# Altium PCB MSP_Adapter.PcbDoc
Units mil, origin at the board's own origin, x right, y up, seen from the top; angles counter-clockwise.
Board outline 2235 x 4400 mil, 2 copper layers (Top Layer, Bottom Layer); 25 components, 32 nets, 325 pads, 0 vias.
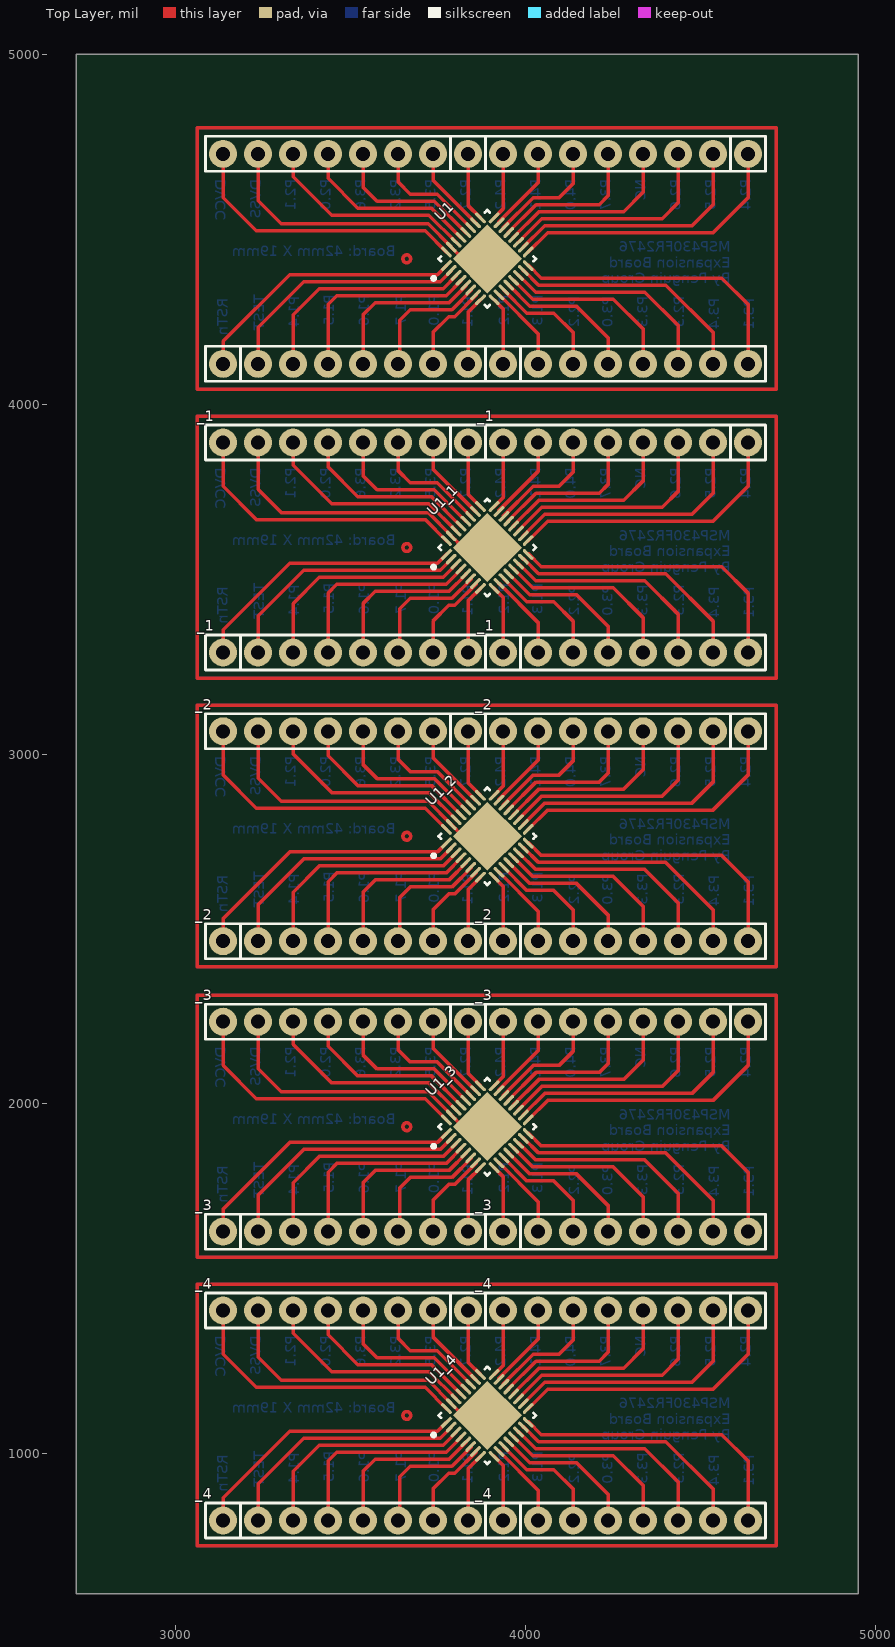
[diagram p0: Top Layer view]
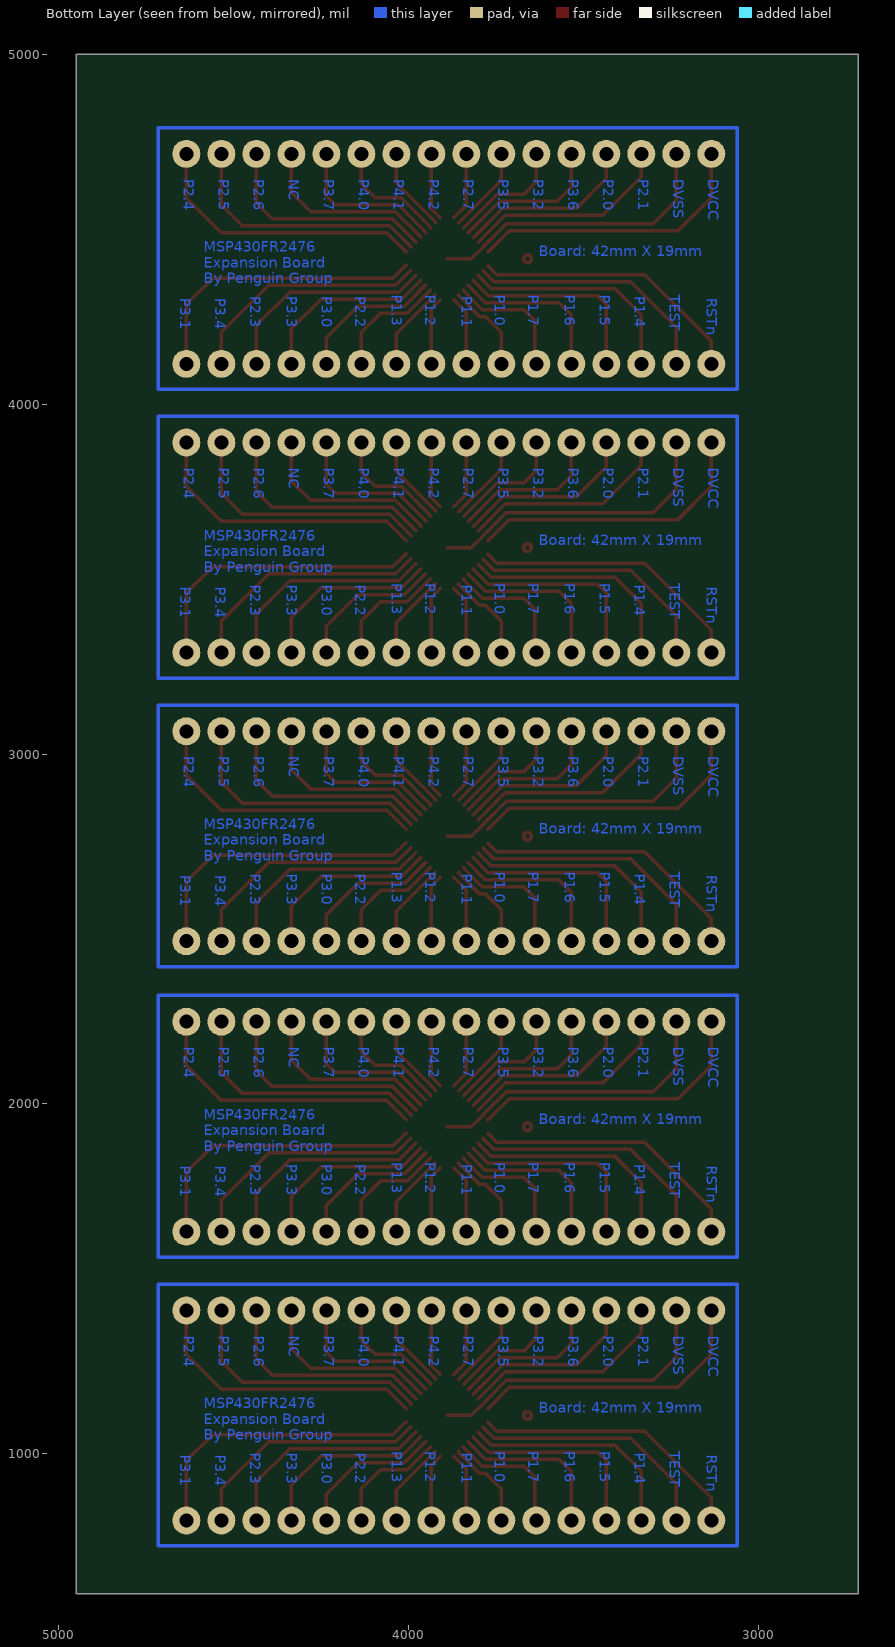
[diagram p1: Bottom Layer view, seen from below]

## Layer stack, top to bottom
Top Solder: solder mask 0.4, Solder Resist, Dk 3.5
Top Layer: signal copper 1.4
Dielectric 1: dielectric 12.6, FR-4, Dk 4.8
Bottom Layer: signal copper 1.4
Bottom Solder: solder mask 0.4, Solder Resist, Dk 3.5

## Board outline
2715,600 4950,600 4950,5000 2715,5000

## Design rules (kind name [scope] priority, off if disabled: settings)
Clearance [All] p1: gap=10 ignorepadtopadclearanceinfootprint=TRUE
PolygonConnect [All] p1: connectstyle=Relief reliefconductorwidth=10 reliefentries=4 polygonreliefangle="90 Angle" airgapwidth=10
RoutingVias [All] p1: holewidth=28 width=50 viastyle="Through Hole" minholewidth=28 minwidth=50 maxholewidth=28 maxwidth=50
SolderMaskExpansion [All] p1: expansion=4 istentingtop=FALSE
Width [All] p1: maxlimit=10 minlimit=10 preferedwidth=10
30 further rules are at their usual default settings.

## Classes and differential pairs
component class MSP_Adapter: U1

## Components (designator, comment, footprint, x,y, rotation, side; value= is the part's Value field where it differs from the comment)
_1 "CON8" SIP8 3135,3290 r0 top (schematic designator J1)
_1 "CON8" SIP8 3935,3290 r0 top (schematic designator J2)
_1 "CON8" SIP8 4635,3890 r180 top (schematic designator J3)
_1 "CON8" SIP8 3835,3890 r180 top (schematic designator J4)
_2 "CON8" SIP8 3135,2465 r0 top (schematic designator J1)
_2 "CON8" SIP8 3935,2465 r0 top (schematic designator J2)
_2 "CON8" SIP8 4635,3065 r180 top (schematic designator J3)
_2 "CON8" SIP8 3835,3065 r180 top (schematic designator J4)
_3 "CON8" SIP8 3135,1635 r0 top (schematic designator J1)
_3 "CON8" SIP8 3935,1635 r0 top (schematic designator J2)
_3 "CON8" SIP8 4635,2235 r180 top (schematic designator J3)
_3 "CON8" SIP8 3835,2235 r180 top (schematic designator J4)
_4 "CON8" SIP8 3135,810 r0 top (schematic designator J1)
_4 "CON8" SIP8 3935,810 r0 top (schematic designator J2)
_4 "CON8" SIP8 4635,1410 r180 top (schematic designator J3)
_4 "CON8" SIP8 3835,1410 r180 top (schematic designator J4)
J1 "CON8" SIP8 3135,4115 r0 top
J2 "CON8" SIP8 3935,4115 r0 top
J3 "CON8" SIP8 4635,4715 r180 top
J4 "CON8" SIP8 3835,4715 r180 top
U1 "MSP430FR2476TRHBR" FP-RHB0032E-IPC_A 3890,4415 r45 top
U1_1 "MSP430FR2476TRHBR" FP-RHB0032E-IPC_A 3890,3590 r45 top (schematic designator U1)
U1_2 "MSP430FR2476TRHBR" FP-RHB0032E-IPC_A 3890,2765 r45 top (schematic designator U1)
U1_3 "MSP430FR2476TRHBR" FP-RHB0032E-IPC_A 3890,1935 r45 top (schematic designator U1)
U1_4 "MSP430FR2476TRHBR" FP-RHB0032E-IPC_A 3890,1110 r45 top (schematic designator U1)

## Footprints (in the part's own frame and the unit in brackets; to place one, negate y for a bottom-side part, rotate by r counter-clockwise, add the part's x,y. Pads: shape width x height; smd on the part's side, far side on the other; paste and mask are expansions set on the pad)
FP-RHB0032E-IPC_A [mm]
  rect 1.01x0.242 smd paste+0 mask+0: 1(-2.451,1.75)
  rrect100% 1.01x0.242 smd paste+0 mask+0: 2(-2.451,1.25) 3(-2.451,0.75) 4(-2.451,0.25) 5(-2.451,-0.25) 6(-2.451,-0.75) 7(-2.451,-1.25) 8(-2.451,-1.75) 17(2.451,-1.75) 18(2.451,-1.25) 19(2.451,-0.75) 20(2.451,-0.25) 21(2.451,0.25) 22(2.451,0.75) 23(2.451,1.25) 24(2.451,1.75)
  rrect100% 0.242x1.01 smd paste+0 mask+0: 9(-1.75,-2.451) 10(-1.25,-2.451) 11(-0.75,-2.451) 12(-0.25,-2.451) 13(0.25,-2.451) 14(0.75,-2.451) 15(1.25,-2.451) 16(1.75,-2.451) 25(1.75,2.451) 26(1.25,2.451) 27(0.75,2.451) 28(0.25,2.451) 29(-0.25,2.451) 30(-0.75,2.451) 31(-1.25,2.451) 32(-1.75,2.451)
  rect 3.55x3.55 smd paste-1000 mask+0: 33(0,0)
  silkscreen extent -3.88,-2.5 2.5,2.5, body extent -3.46,-3.46 3.46,3.46, height 0.25
SIP8 [mil]
  round 80 hole 40: 1(0,0) 2(100,0) 3(200,0) 4(300,0) 5(400,0) 6(500,0) 7(600,0) 8(700,0)
  silkscreen extent -50,-50 750,50, body extent -50,-50 750,50, height 330

## Part data
U1 U1_1 U1_2 U1_3 U1_4: library part CMP-04869-000099-1, "IC MCU 16BIT 64.5KB FRAM 32VQFN"

## Nets (pads, with @x,y where several pads share a name; then routed paths per layer and width w, separated by ;. In a path a pad name is that pad's centre, name@x,y a point inside that pad or via, vN(x,y) a via of type N, cw(c..) or ccw(c..) an arc to the next point about the centre after c; other vN are vias at no path point)
DVCC: J4.8 U1.32 | length 827.4
  Top Layer w10: J4.8 3135,4590 3230,4495 3712.56,4495 U1.32
DVSS: J4.7 U1.31 U1.33 | length 858.3
  Top Layer w10: J4.7 3235,4580.86 3300.86,4515 3720.85,4515 3787.18,4448.66 U1.31 3820.4,4415 U1.33
NC: J3.4 U1.20 | length 534.5
  Top Layer w10: U1.20 3964.53,4476.95 4037.58,4550 4280,4550 4335,4605 J3.4
P1.0: J1.7 U1.7 | length 258.5
  Top Layer w10: J1.7 3735,4205 3780,4250 3797.27,4250 3857.89,4310.63 U1.7
P1.1: J1.8 U1.8 | length 197.7
  Top Layer w10: J1.8 3835,4262.56 U1.8
P1.2: J2.1 U1.9 | length 193.6
  Top Layer w10: U1.9 3935,4272.56 J2.1
P1.3: J2.2 U1.10 | length 243.6
  Top Layer w10: U1.10 3923.66,4312.18 4035,4200.85 J2.2
P1.4: J1.3 U1.3 | length 653.4
  Top Layer w10: J1.3 3335,4255 3410,4330 3764.13,4330 3801.33,4367.19 U1.3
P1.5: J1.4 U1.4 | length 579.6
  Top Layer w10: J1.4 3435,4285 3460,4310 3772.42,4310 3815.47,4353.05 U1.4
P1.6: J1.5 U1.5 | length 470.6
  Top Layer w10: J1.5 3535,4255 3570,4290 3780.7,4290 3829.61,4338.91 U1.5
P1.7: J1.6 U1.6 | length 367.5
  Top Layer w10: J1.6 3640,4120 3640,4240 3670,4270 3788.99,4270 3843.75,4324.77 U1.6
P2.0: J4.5 U1.29 | length 519.9
  Top Layer w10: J4.5 3435,4645 3520,4560 3730.64,4560 3814.58,4476.06 U1.29
P2.1: J4.6 U1.30 | length 608.6
  Top Layer w10: J4.6 3335,4650 3445,4540 3723.24,4540 U1.30
P2.2: J2.3 U1.11 | length 337.7
  Top Layer w10: U1.11 4003.24,4260 4080,4260 4135,4205 J2.3
P2.3: J2.6 U1.14 | length 625.5
  Top Layer w10: U1.14 3979.79,4368.31 4028.09,4320 4340,4320 4435,4225 J2.6
P2.4: J3.1 U1.17 | length 817.4
  Top Layer w10: U1.17 4062.44,4490 4535,4490 4635,4590 J3.1
P2.5: J3.2 U1.18 | length 737.8
  Top Layer w10: U1.18 3992.82,4448.66 4054.15,4510 4475,4510 4535,4570 J3.2
P2.6: J3.3 U1.19 | length 643.4
  Top Layer w10: U1.19 3978.67,4462.81 4045.87,4530 4390,4530 4435,4575 J3.3
P2.7: J4.1 U1.25 | length 197.7
  Top Layer w10: J4.1 3835,4567.44 U1.25
P3.0: J2.4 U1.12 | length 421
  Top Layer w10: U1.12 3951.5,4340.02 4011.53,4280 4145,4280 4235,4190 J2.4
P3.1: J2.8 U1.16 | length 844.7
  Top Layer w10: U1.16 4008.07,4396.59 4044.66,4360 4560,4360 4635,4285 J2.8
P3.2: J4.3 U1.27 | length 341.9
  Top Layer w10: J4.3 3635,4635 3670,4600 3746.76,4600 U1.27
P3.3: J2.5 U1.13 | length 527.6
  Top Layer w10: U1.13 3965.64,4354.17 4019.81,4300 4250,4300 4335,4215 J2.5
P3.4: J2.7 U1.15 | length 705.8
  Top Layer w10: U1.15 3993.93,4382.45 4036.38,4340 4400,4340 4535,4205 J2.7
P3.5: J4.2 U1.26 | length 247.8
  Top Layer w10: J4.2 3735,4639.15 3856.34,4517.82 U1.26
P3.6: J4.4 U1.28 | length 442.5
  Top Layer w10: J4.4 3535,4620 3575,4580 3738.92,4580 U1.28
P3.7: J3.5 U1.21 | length 448.9
  Top Layer w10: U1.21 3950.39,4491.09 4029.3,4570 4210,4570 4235,4595 J3.5
P4.0: J3.6 U1.22 | length 337
  Top Layer w10: U1.22 3936.25,4505.23 4021.01,4590 4095,4590 4135,4630 J3.6
P4.1: J3.7 U1.23 | length 244.3
  Top Layer w10: U1.23 3922.11,4519.37 4035,4632.27 J3.7
P4.2: J3.8 U1.24 | length 193.6
  Top Layer w10: U1.24 3935,4557.44 J3.8
RSTn: J1.1 U1.1 | length 792.3
  Top Layer w10: J1.1 3135,4180 3325,4370 3747.56,4370 U1.1
TEST: J1.2 U1.2 | length 724.3
  Top Layer w10: J1.2 3235,4220 3365,4350 3755.85,4350 3787.18,4381.34 U1.2
pads on no net: _1.1 _1.2 _1.3 _1.4 _1.5 _1.6 _1.7 _1.8 _2.1 _2.2 _2.3 _2.4 _2.5 _2.6 _2.7 _2.8 _3.1 _3.2 _3.3 _3.4 _3.5 _3.6 _3.7 _3.8 _4.1 _4.2 _4.3 _4.4 _4.5 _4.6 _4.7 _4.8 U1_1.1 U1_1.2 U1_1.3 U1_1.4 U1_1.5 U1_1.6 U1_1.7 U1_1.8 U1_1.9 U1_1.10 U1_1.11 U1_1.12 U1_1.13 U1_1.14 U1_1.15 U1_1.16 U1_1.17 U1_1.18 U1_1.19 U1_1.20 U1_1.21 U1_1.22 U1_1.23 U1_1.24 U1_1.25 U1_1.26 U1_1.27 U1_1.28 U1_1.29 U1_1.30 U1_1.31 U1_1.32 U1_1.33 U1_2.1 U1_2.2 U1_2.3 U1_2.4 U1_2.5 U1_2.6 U1_2.7 U1_2.8 U1_2.9 U1_2.10 U1_2.11 U1_2.12 U1_2.13 U1_2.14 U1_2.15 U1_2.16 U1_2.17 U1_2.18 U1_2.19 U1_2.20 U1_2.21 U1_2.22 U1_2.23 U1_2.24 U1_2.25 U1_2.26 U1_2.27 U1_2.28 U1_2.29 U1_2.30 U1_2.31 U1_2.32 U1_2.33 U1_3.1 U1_3.2 U1_3.3 U1_3.4 U1_3.5 U1_3.6 U1_3.7 U1_3.8 U1_3.9 U1_3.10 U1_3.11 U1_3.12 U1_3.13 U1_3.14 U1_3.15 U1_3.16 U1_3.17 U1_3.18 U1_3.19 U1_3.20 U1_3.21 U1_3.22 U1_3.23 U1_3.24 U1_3.25 U1_3.26 U1_3.27 U1_3.28 U1_3.29 U1_3.30 U1_3.31 U1_3.32 U1_3.33 U1_4.1 U1_4.2 U1_4.3 U1_4.4 U1_4.5 U1_4.6 U1_4.7 U1_4.8 U1_4.9 U1_4.10 U1_4.11 U1_4.12 U1_4.13 U1_4.14 U1_4.15 U1_4.16 U1_4.17 U1_4.18 U1_4.19 U1_4.20 U1_4.21 U1_4.22 U1_4.23 U1_4.24 U1_4.25 U1_4.26 U1_4.27 U1_4.28 U1_4.29 U1_4.30 U1_4.31 U1_4.32 U1_4.33
copper on no net: | length 112160.9
  Top Layer w10: 3135,810 3135,875 3325,1065 3747.56,1065 3773.04,1090.48 ; 3135,1410 3135,1285 3230,1190 3712.56,1190 3773.04,1129.52 ; 3135,1635 3135,1700 3325,1890 3747.56,1890 3773.04,1915.48 ; 3135,2235 3135,2110 3230,2015 3712.56,2015 3773.04,1954.52 ; 3135,2465 3135,2530 3325,2720 3747.56,2720 3773.04,2745.48 ; 3135,3065 3135,2940 3230,2845 3712.56,2845 3773.04,2784.52 ; 3135,3290 3135,3355 3325,3545 3747.56,3545 3773.04,3570.48 ; 3135,3890 3135,3765 3230,3670 3712.56,3670 3773.04,3609.52 ; 3235,810 3235,915 3365,1045 3755.85,1045 3787.18,1076.34 3786.96,1076.56 ; 3235,1410 3235,1275.86 3300.86,1210 3720.85,1210 3787.18,1143.66 3786.96,1143.44 3820.4,1110 3890,1110 ; 3235,1635 3235,1740 3365,1870 3755.85,1870 3787.18,1901.34 3786.96,1901.56 ; 3235,2235 3235,2100.86 3300.86,2035 3720.85,2035 3787.18,1968.66 3786.96,1968.44 3820.4,1935 3890,1935 ; 3235,2465 3235,2570 3365,2700 3755.85,2700 3787.18,2731.34 3786.96,2731.56 ; 3235,3065 3235,2930.86 3300.86,2865 3720.85,2865 3787.18,2798.66 3786.96,2798.44 3820.4,2765 3890,2765 ; 3235,3290 3235,3395 3365,3525 3755.85,3525 3787.18,3556.34 3786.96,3556.56 ; 3235,3890 3235,3755.86 3300.86,3690 3720.85,3690 3787.18,3623.66 3786.96,3623.44 3820.4,3590 3890,3590 ; 3335,810 3335,950 3410,1025 3764.13,1025 3801.33,1062.19 3800.88,1062.64 ; 3335,1410 3335,1345 3445,1235 3723.24,1235 3800.88,1157.36 ; 3335,1635 3335,1775 3410,1850 3764.13,1850 3801.33,1887.19 3800.88,1887.64 ; 3335,2235 3335,2170 3445,2060 3723.24,2060 3800.88,1982.36 ; 3335,2465 3335,2605 3410,2680 3764.13,2680 3801.33,2717.19 3800.88,2717.64 ; 3335,3065 3335,3000 3445,2890 3723.24,2890 3800.88,2812.36 ; 3335,3290 3335,3430 3410,3505 3764.13,3505 3801.33,3542.19 3800.88,3542.64 ; 3335,3890 3335,3825 3445,3715 3723.24,3715 3800.88,3637.36 ; 3435,810 3435,980 3460,1005 3772.42,1005 3815.47,1048.05 3814.8,1048.72 ; 3435,1410 3435,1340 3520,1255 3730.64,1255 3814.58,1171.06 3814.8,1171.28 ; 3435,1635 3435,1805 3460,1830 3772.42,1830 3815.47,1873.05 3814.8,1873.72 ; 3435,2235 3435,2165 3520,2080 3730.64,2080 3814.58,1996.06 3814.8,1996.28 ; 3435,2465 3435,2635 3460,2660 3772.42,2660 3815.47,2703.05 3814.8,2703.72 ; 3435,3065 3435,2995 3520,2910 3730.64,2910 3814.58,2826.06 3814.8,2826.28 ; 3435,3290 3435,3460 3460,3485 3772.42,3485 3815.47,3528.05 3814.8,3528.72 ; 3435,3890 3435,3820 3520,3735 3730.64,3735 3814.58,3651.06 3814.8,3651.28 ; 3535,810 3535,950 3570,985 3780.7,985 3829.61,1033.91 3828.72,1034.8 ; 3535,1410 3535,1315 3575,1275 3738.92,1275 3828.72,1185.2 ; 3535,1635 3535,1775 3570,1810 3780.7,1810 3829.61,1858.91 3828.72,1859.8 ; 3535,2235 3535,2140 3575,2100 3738.92,2100 3828.72,2010.2 ; 3535,2465 3535,2605 3570,2640 3780.7,2640 3829.61,2688.91 3828.72,2689.8 ; 3535,3065 3535,2970 3575,2930 3738.92,2930 3828.72,2840.2 ; 3535,3290 3535,3430 3570,3465 3780.7,3465 3829.61,3513.91 3828.72,3514.8 ; 3535,3890 3535,3795 3575,3755 3738.92,3755 3828.72,3665.2 ; 3635,810 3640,815 3640,935 3670,965 3788.99,965 3843.75,1019.77 3842.64,1020.88 ; 3635,1410 3635,1330 3670,1295 3746.76,1295 3842.64,1199.12 ; 3635,1635 3640,1640 3640,1760 3670,1790 3788.99,1790 3843.75,1844.77 3842.64,1845.88 ; 3635,2235 3635,2155 3670,2120 3746.76,2120 3842.64,2024.12 ; 3635,2465 3640,2470 3640,2590 3670,2620 3788.99,2620 3843.75,2674.77 3842.64,2675.88 ; 3635,3065 3635,2985 3670,2950 3746.76,2950 3842.64,2854.12 ; 3635,3290 3640,3295 3640,3415 3670,3445 3788.99,3445 3843.75,3499.77 3842.64,3500.88 ; 3635,3890 3635,3810 3670,3775 3746.76,3775 3842.64,3679.12 ; 3735,810 3735,900 3780,945 3797.27,945 3857.89,1005.63 3856.56,1006.96 ; 3735,1410 3735,1334.15 3856.34,1212.82 3856.56,1213.04 ; 3735,1635 3735,1725 3780,1770 3797.27,1770 3857.89,1830.63 3856.56,1831.96 ; 3735,2235 3735,2159.15 3856.34,2037.82 3856.56,2038.04 ; 3735,2465 3735,2555 3780,2600 3797.27,2600 3857.89,2660.63 3856.56,2661.96 ; 3735,3065 3735,2989.15 3856.34,2867.82 3856.56,2868.04 ; 3735,3290 3735,3380 3780,3425 3797.27,3425 3857.89,3485.63 3856.56,3486.96 ; 3735,3890 3735,3814.15 3856.34,3692.82 3856.56,3693.04 ; 3835,810 3835,957.56 3870.48,993.04 ; 3835,1410 3835,1262.44 3870.48,1226.96 ; 3835,1635 3835,1782.56 3870.48,1818.04 ; 3835,2235 3835,2087.44 3870.48,2051.96 ; 3835,2465 3835,2612.56 3870.48,2648.04 ; 3835,3065 3835,2917.44 3870.48,2881.96 ; 3835,3290 3835,3437.56 3870.48,3473.04 ; 3835,3890 3835,3742.44 3870.48,3706.96 ; 3909.52,993.04 3935,967.56 3935,810 ; 3909.52,1226.96 3935,1252.44 3935,1410 ; 3909.52,1818.04 3935,1792.56 3935,1635 ; 3909.52,2051.96 3935,2077.44 3935,2235 ; 3909.52,2648.04 3935,2622.56 3935,2465 ; 3909.52,2881.96 3935,2907.44 3935,3065 ; 3909.52,3473.04 3935,3447.56 3935,3290 ; 3909.52,3706.96 3935,3732.44 3935,3890 ; 3923.44,1006.96 3923.66,1007.18 4035,895.85 4035,810 ; 3923.44,1213.04 3922.11,1214.37 4035,1327.27 4035,1410 ; 3923.44,1831.96 3923.66,1832.18 4035,1720.85 4035,1635 ; 3923.44,2038.04 3922.11,2039.37 4035,2152.27 4035,2235 ; 3923.44,2661.96 3923.66,2662.18 4035,2550.85 4035,2465 ; 3923.44,2868.04 3922.11,2869.37 4035,2982.27 4035,3065 ; 3923.44,3486.96 3923.66,3487.18 4035,3375.85 4035,3290 ; 3923.44,3693.04 3922.11,3694.37 4035,3807.27 4035,3890 ; 3937.36,1020.88 4003.24,955 4080,955 4135,900 4135,810 ; 3937.36,1199.12 3936.25,1200.23 4021.01,1285 4095,1285 4135,1325 4135,1410 ; 3937.36,1845.88 4003.24,1780 4080,1780 4135,1725 4135,1635 ; 3937.36,2024.12 3936.25,2025.23 4021.01,2110 4095,2110 4135,2150 4135,2235 ; 3937.36,2675.88 4003.24,2610 4080,2610 4135,2555 4135,2465 ; 3937.36,2854.12 3936.25,2855.23 4021.01,2940 4095,2940 4135,2980 4135,3065 ; 3937.36,3500.88 4003.24,3435 4080,3435 4135,3380 4135,3290 ; 3937.36,3679.12 3936.25,3680.23 4021.01,3765 4095,3765 4135,3805 4135,3890 ; 3951.28,1034.8 3951.5,1035.02 4011.53,975 4145,975 4235,885 4235,810 ; 3951.28,1185.2 3950.39,1186.09 4029.3,1265 4210,1265 4235,1290 4235,1410 ; 3951.28,1859.8 3951.5,1860.02 4011.53,1800 4145,1800 4235,1710 4235,1635 ; 3951.28,2010.2 3950.39,2011.09 4029.3,2090 4210,2090 4235,2115 4235,2235 ; 3951.28,2689.8 3951.5,2690.02 4011.53,2630 4145,2630 4235,2540 4235,2465 ; 3951.28,2840.2 3950.39,2841.09 4029.3,2920 4210,2920 4235,2945 4235,3065 ; 3951.28,3514.8 3951.5,3515.02 4011.53,3455 4145,3455 4235,3365 4235,3290 ; 3951.28,3665.2 3950.39,3666.09 4029.3,3745 4210,3745 4235,3770 4235,3890 ; 3965.2,1048.72 3965.64,1049.17 4019.81,995 4250,995 4335,910 4335,810 ; 3965.2,1171.28 3964.53,1171.95 4037.58,1245 4280,1245 4335,1300 4335,1410 ; 3965.2,1873.72 3965.64,1874.17 4019.81,1820 4250,1820 4335,1735 4335,1635 ; 3965.2,1996.28 3964.53,1996.95 4037.58,2070 4280,2070 4335,2125 4335,2235 ; 3965.2,2703.72 3965.64,2704.17 4019.81,2650 4250,2650 4335,2565 4335,2465 ; 3965.2,2826.28 3964.53,2826.95 4037.58,2900 4280,2900 4335,2955 4335,3065 ; 3965.2,3528.72 3965.64,3529.17 4019.81,3475 4250,3475 4335,3390 4335,3290 ; 3965.2,3651.28 3964.53,3651.95 4037.58,3725 4280,3725 4335,3780 4335,3890 ; 3979.12,1062.64 3979.79,1063.31 4028.09,1015 4340,1015 4435,920 4435,810 ; 3979.12,1157.36 3978.67,1157.81 4045.87,1225 4390,1225 4435,1270 4435,1410 ; 3979.12,1887.64 3979.79,1888.31 4028.09,1840 4340,1840 4435,1745 4435,1635 ; 3979.12,1982.36 3978.67,1982.81 4045.87,2050 4390,2050 4435,2095 4435,2235 ; 3979.12,2717.64 3979.79,2718.31 4028.09,2670 4340,2670 4435,2575 4435,2465 ; 3979.12,2812.36 3978.67,2812.81 4045.87,2880 4390,2880 4435,2925 4435,3065 ; 3979.12,3542.64 3979.79,3543.31 4028.09,3495 4340,3495 4435,3400 4435,3290 ; 3979.12,3637.36 3978.67,3637.81 4045.87,3705 4390,3705 4435,3750 4435,3890 ; 3993.04,1076.56 3993.93,1077.45 4036.38,1035 4400,1035 4535,900 4535,810 ; 3993.04,1143.44 3992.82,1143.66 4054.15,1205 4475,1205 4535,1265 4535,1410 ; 3993.04,1901.56 3993.93,1902.45 4036.38,1860 4400,1860 4535,1725 4535,1635 ; 3993.04,1968.44 3992.82,1968.66 4054.15,2030 4475,2030 4535,2090 4535,2235 ; 3993.04,2731.56 3993.93,2732.45 4036.38,2690 4400,2690 4535,2555 4535,2465 ; 3993.04,2798.44 3992.82,2798.66 4054.15,2860 4475,2860 4535,2920 4535,3065 ; 3993.04,3556.56 3993.93,3557.45 4036.38,3515 4400,3515 4535,3380 4535,3290 ; 3993.04,3623.44 3992.82,3623.66 4054.15,3685 4475,3685 4535,3745 4535,3890 ; 4006.96,1090.48 4008.07,1091.59 4044.66,1055 4560,1055 4635,980 4635,810 ; 4006.96,1129.52 4062.44,1185 4535,1185 4635,1285 4635,1410 ; 4006.96,1915.48 4008.07,1916.59 4044.66,1880 4560,1880 4635,1805 4635,1635 ; 4006.96,1954.52 4062.44,2010 4535,2010 4635,2110 4635,2235 ; 4006.96,2745.48 4008.07,2746.59 4044.66,2710 4560,2710 4635,2635 4635,2465 ; 4006.96,2784.52 4062.44,2840 4535,2840 4635,2940 4635,3065 ; 4006.96,3570.48 4008.07,3571.59 4044.66,3535 4560,3535 4635,3460 4635,3290 ; 4006.96,3609.52 4062.44,3665 4535,3665 4635,3765 4635,3890 ; 3061.46,736.97 4715,736.97 4715,1485 3061.46,1485 3061.46,736.97 ; 3061.46,1561.97 4715,1561.97 4715,2310 3061.46,2310 3061.46,1561.97 ; 3061.46,2391.97 4715,2391.97 4715,3140 3061.46,3140 3061.46,2391.97 ; 3061.46,3216.97 4715,3216.97 4715,3965 3061.46,3965 3061.46,3216.97 ; 3061.46,4041.97 4715,4041.97 4715,4790 3061.46,4790 3061.46,4041.97 ; 3671.18,1110 ccw(c3660,1110) 3671.18,1110 ; 3671.18,1935 ccw(c3660,1935) 3671.18,1935 ; 3671.18,2765 ccw(c3660,2765) 3671.18,2765 ; 3671.18,3590 ccw(c3660,3590) 3671.18,3590 ; 3671.18,4415 ccw(c3660,4415) 3671.18,4415
  Bottom Layer w10: 3061.46,736.97 4715,736.97 4715,1485 3061.46,1485 3061.46,736.97 ; 3061.46,1561.97 4715,1561.97 4715,2310 3061.46,2310 3061.46,1561.97 ; 3061.46,2391.97 4715,2391.97 4715,3140 3061.46,3140 3061.46,2391.97 ; 3061.46,3216.97 4715,3216.97 4715,3965 3061.46,3965 3061.46,3216.97 ; 3061.46,4041.97 4715,4041.97 4715,4790 3061.46,4790 3061.46,4041.97

## Other copper
Bottom Layer:
  text "DVCC" at 3143,4643 h30 r90
  text "DVSS" at 3243,4643 h30 r90
  text "P2.1" at 3343,4643 h30 r90
  text "P2.0" at 3443,4643 h30 r90
  text "P3.6" at 3543,4643 h30 r90
  text "P3.2" at 3643,4643 h30 r90
  text "P3.5" at 3743,4643 h30 r90
  text "P2.7" at 3843,4643 h30 r90
  text "P4.2" at 3943,4643 h30 r90
  text "P4.1" at 4043,4643 h30 r90
  text "P4.0" at 4143,4643 h30 r90
  text "P3.7" at 4243,4643 h30 r90
  text "NC" at 4343,4643 h30 r90
  text "P2.6" at 4443,4643 h30 r90
  text "P2.5" at 4543,4643 h30 r90
  text "P2.4" at 4643,4643 h30 r90
  text "Board: 42mm X 19mm" at 3628,4422 h30
  text "MSP430FR2476 / Expansion Board / By Penguin Group" at 4585,4345 h30
  text "TEST" at 3253,4313 h30 r90
  text "P1.5" at 3453,4313 h30 r90
  text "P1.6" at 3553,4313 h30 r90
  text "P1.7" at 3658,4313 h30 r90
  text "P1.0" at 3753,4313 h30 r90
  text "P1.2" at 3953,4313 h30 r90
  text "P1.3" at 4048,4313 h30 r90
  text "P1.4" at 3353,4308 h30 r90
  text "P1.1" at 3848,4308 h30 r90
  text "P2.2" at 4153,4308 h30 r90
  text "P3.0" at 4248,4308 h30 r90
  text "P3.3" at 4348,4308 h30 r90
  text "P2.3" at 4453,4308 h30 r90
  text "RSTn" at 3148,4303 h30 r90
  text "P3.4" at 4553,4303 h30 r90
  text "P3.1" at 4653,4303 h30 r90
  text "DVCC" at 3143,3818 h30 r90
  text "DVSS" at 3243,3818 h30 r90
  text "P2.1" at 3343,3818 h30 r90
  text "P2.0" at 3443,3818 h30 r90
  text "P3.6" at 3543,3818 h30 r90
  text "P3.2" at 3643,3818 h30 r90
  text "P3.5" at 3743,3818 h30 r90
  text "P2.7" at 3843,3818 h30 r90
  text "P4.2" at 3943,3818 h30 r90
  text "P4.1" at 4043,3818 h30 r90
  text "P4.0" at 4143,3818 h30 r90
  text "P3.7" at 4243,3818 h30 r90
  text "NC" at 4343,3818 h30 r90
  text "P2.6" at 4443,3818 h30 r90
  text "P2.5" at 4543,3818 h30 r90
  text "P2.4" at 4643,3818 h30 r90
  text "Board: 42mm X 19mm" at 3628,3597 h30
  text "MSP430FR2476 / Expansion Board / By Penguin Group" at 4585,3520 h30
  text "TEST" at 3253,3488 h30 r90
  text "P1.5" at 3453,3488 h30 r90
  text "P1.6" at 3553,3488 h30 r90
  text "P1.7" at 3658,3488 h30 r90
  text "P1.0" at 3753,3488 h30 r90
  text "P1.2" at 3953,3488 h30 r90
  text "P1.3" at 4048,3488 h30 r90
  text "P1.4" at 3353,3483 h30 r90
  text "P1.1" at 3848,3483 h30 r90
  text "P2.2" at 4153,3483 h30 r90
  text "P3.0" at 4248,3483 h30 r90
  text "P3.3" at 4348,3483 h30 r90
  text "P2.3" at 4453,3483 h30 r90
  text "RSTn" at 3148,3478 h30 r90
  text "P3.4" at 4553,3478 h30 r90
  text "P3.1" at 4653,3478 h30 r90
  text "DVCC" at 3143,2993 h30 r90
  text "DVSS" at 3243,2993 h30 r90
  text "P2.1" at 3343,2993 h30 r90
  text "P2.0" at 3443,2993 h30 r90
  text "P3.6" at 3543,2993 h30 r90
  text "P3.2" at 3643,2993 h30 r90
  text "P3.5" at 3743,2993 h30 r90
  text "P2.7" at 3843,2993 h30 r90
  text "P4.2" at 3943,2993 h30 r90
  text "P4.1" at 4043,2993 h30 r90
  text "P4.0" at 4143,2993 h30 r90
  text "P3.7" at 4243,2993 h30 r90
  text "NC" at 4343,2993 h30 r90
  text "P2.6" at 4443,2993 h30 r90
  text "P2.5" at 4543,2993 h30 r90
  text "P2.4" at 4643,2993 h30 r90
  text "Board: 42mm X 19mm" at 3628,2772 h30
  text "MSP430FR2476 / Expansion Board / By Penguin Group" at 4585,2695 h30
  text "TEST" at 3253,2663 h30 r90
  text "P1.5" at 3453,2663 h30 r90
  text "P1.6" at 3553,2663 h30 r90
  text "P1.7" at 3658,2663 h30 r90
  text "P1.0" at 3753,2663 h30 r90
  text "P1.2" at 3953,2663 h30 r90
  text "P1.3" at 4048,2663 h30 r90
  text "P1.4" at 3353,2658 h30 r90
  text "P1.1" at 3848,2658 h30 r90
  text "P2.2" at 4153,2658 h30 r90
  text "P3.0" at 4248,2658 h30 r90
  text "P3.3" at 4348,2658 h30 r90
  text "P2.3" at 4453,2658 h30 r90
  text "RSTn" at 3148,2653 h30 r90
  text "P3.4" at 4553,2653 h30 r90
  text "P3.1" at 4653,2653 h30 r90
  text "DVCC" at 3143,2163 h30 r90
  text "DVSS" at 3243,2163 h30 r90
  text "P2.1" at 3343,2163 h30 r90
  text "P2.0" at 3443,2163 h30 r90
  text "P3.6" at 3543,2163 h30 r90
  text "P3.2" at 3643,2163 h30 r90
  text "P3.5" at 3743,2163 h30 r90
  text "P2.7" at 3843,2163 h30 r90
  text "P4.2" at 3943,2163 h30 r90
  text "P4.1" at 4043,2163 h30 r90
  text "P4.0" at 4143,2163 h30 r90
  text "P3.7" at 4243,2163 h30 r90
  text "NC" at 4343,2163 h30 r90
  text "P2.6" at 4443,2163 h30 r90
  text "P2.5" at 4543,2163 h30 r90
  text "P2.4" at 4643,2163 h30 r90
  text "Board: 42mm X 19mm" at 3628,1942 h30
  text "MSP430FR2476 / Expansion Board / By Penguin Group" at 4585,1865 h30
  text "TEST" at 3253,1833 h30 r90
  text "P1.5" at 3453,1833 h30 r90
  text "P1.6" at 3553,1833 h30 r90
  text "P1.7" at 3658,1833 h30 r90
  text "P1.0" at 3753,1833 h30 r90
  text "P1.2" at 3953,1833 h30 r90
  text "P1.3" at 4048,1833 h30 r90
  text "P1.4" at 3353,1828 h30 r90
  text "P1.1" at 3848,1828 h30 r90
  text "P2.2" at 4153,1828 h30 r90
  text "P3.0" at 4248,1828 h30 r90
  text "P3.3" at 4348,1828 h30 r90
  text "P2.3" at 4453,1828 h30 r90
  text "RSTn" at 3148,1823 h30 r90
  text "P3.4" at 4553,1823 h30 r90
  text "P3.1" at 4653,1823 h30 r90
  text "DVCC" at 3143,1338 h30 r90
  text "DVSS" at 3243,1338 h30 r90
  text "P2.1" at 3343,1338 h30 r90
  text "P2.0" at 3443,1338 h30 r90
  text "P3.6" at 3543,1338 h30 r90
  text "P3.2" at 3643,1338 h30 r90
  text "P3.5" at 3743,1338 h30 r90
  text "P2.7" at 3843,1338 h30 r90
  text "P4.2" at 3943,1338 h30 r90
  text "P4.1" at 4043,1338 h30 r90
  text "P4.0" at 4143,1338 h30 r90
  text "P3.7" at 4243,1338 h30 r90
  text "NC" at 4343,1338 h30 r90
  text "P2.6" at 4443,1338 h30 r90
  text "P2.5" at 4543,1338 h30 r90
  text "P2.4" at 4643,1338 h30 r90
  text "Board: 42mm X 19mm" at 3628,1117 h30
  text "MSP430FR2476 / Expansion Board / By Penguin Group" at 4585,1040 h30
  text "TEST" at 3253,1008 h30 r90
  text "P1.5" at 3453,1008 h30 r90
  text "P1.6" at 3553,1008 h30 r90
  text "P1.7" at 3658,1008 h30 r90
  text "P1.0" at 3753,1008 h30 r90
  text "P1.2" at 3953,1008 h30 r90
  text "P1.3" at 4048,1008 h30 r90
  text "P1.4" at 3353,1003 h30 r90
  text "P1.1" at 3848,1003 h30 r90
  text "P2.2" at 4153,1003 h30 r90
  text "P3.0" at 4248,1003 h30 r90
  text "P3.3" at 4348,1003 h30 r90
  text "P2.3" at 4453,1003 h30 r90
  text "RSTn" at 3148,998 h30 r90
  text "P3.4" at 4553,998 h30 r90
  text "P3.1" at 4653,998 h30 r90